# Altium PCB Avalon_ctrlunit.PcbDoc (part 2 of 6)
Units mil, origin at the board's own origin, x right, y up, seen from the top; angles counter-clockwise.
Board outline 3947.62 x 3160.22 mil, 4 copper layers (Top Layer, Mid-Layer 1, Mid-Layer 2, Bottom Layer); 194 components, 260 nets, 936 pads, 465 vias.
Unrouted connection lines stored in the file: 1.
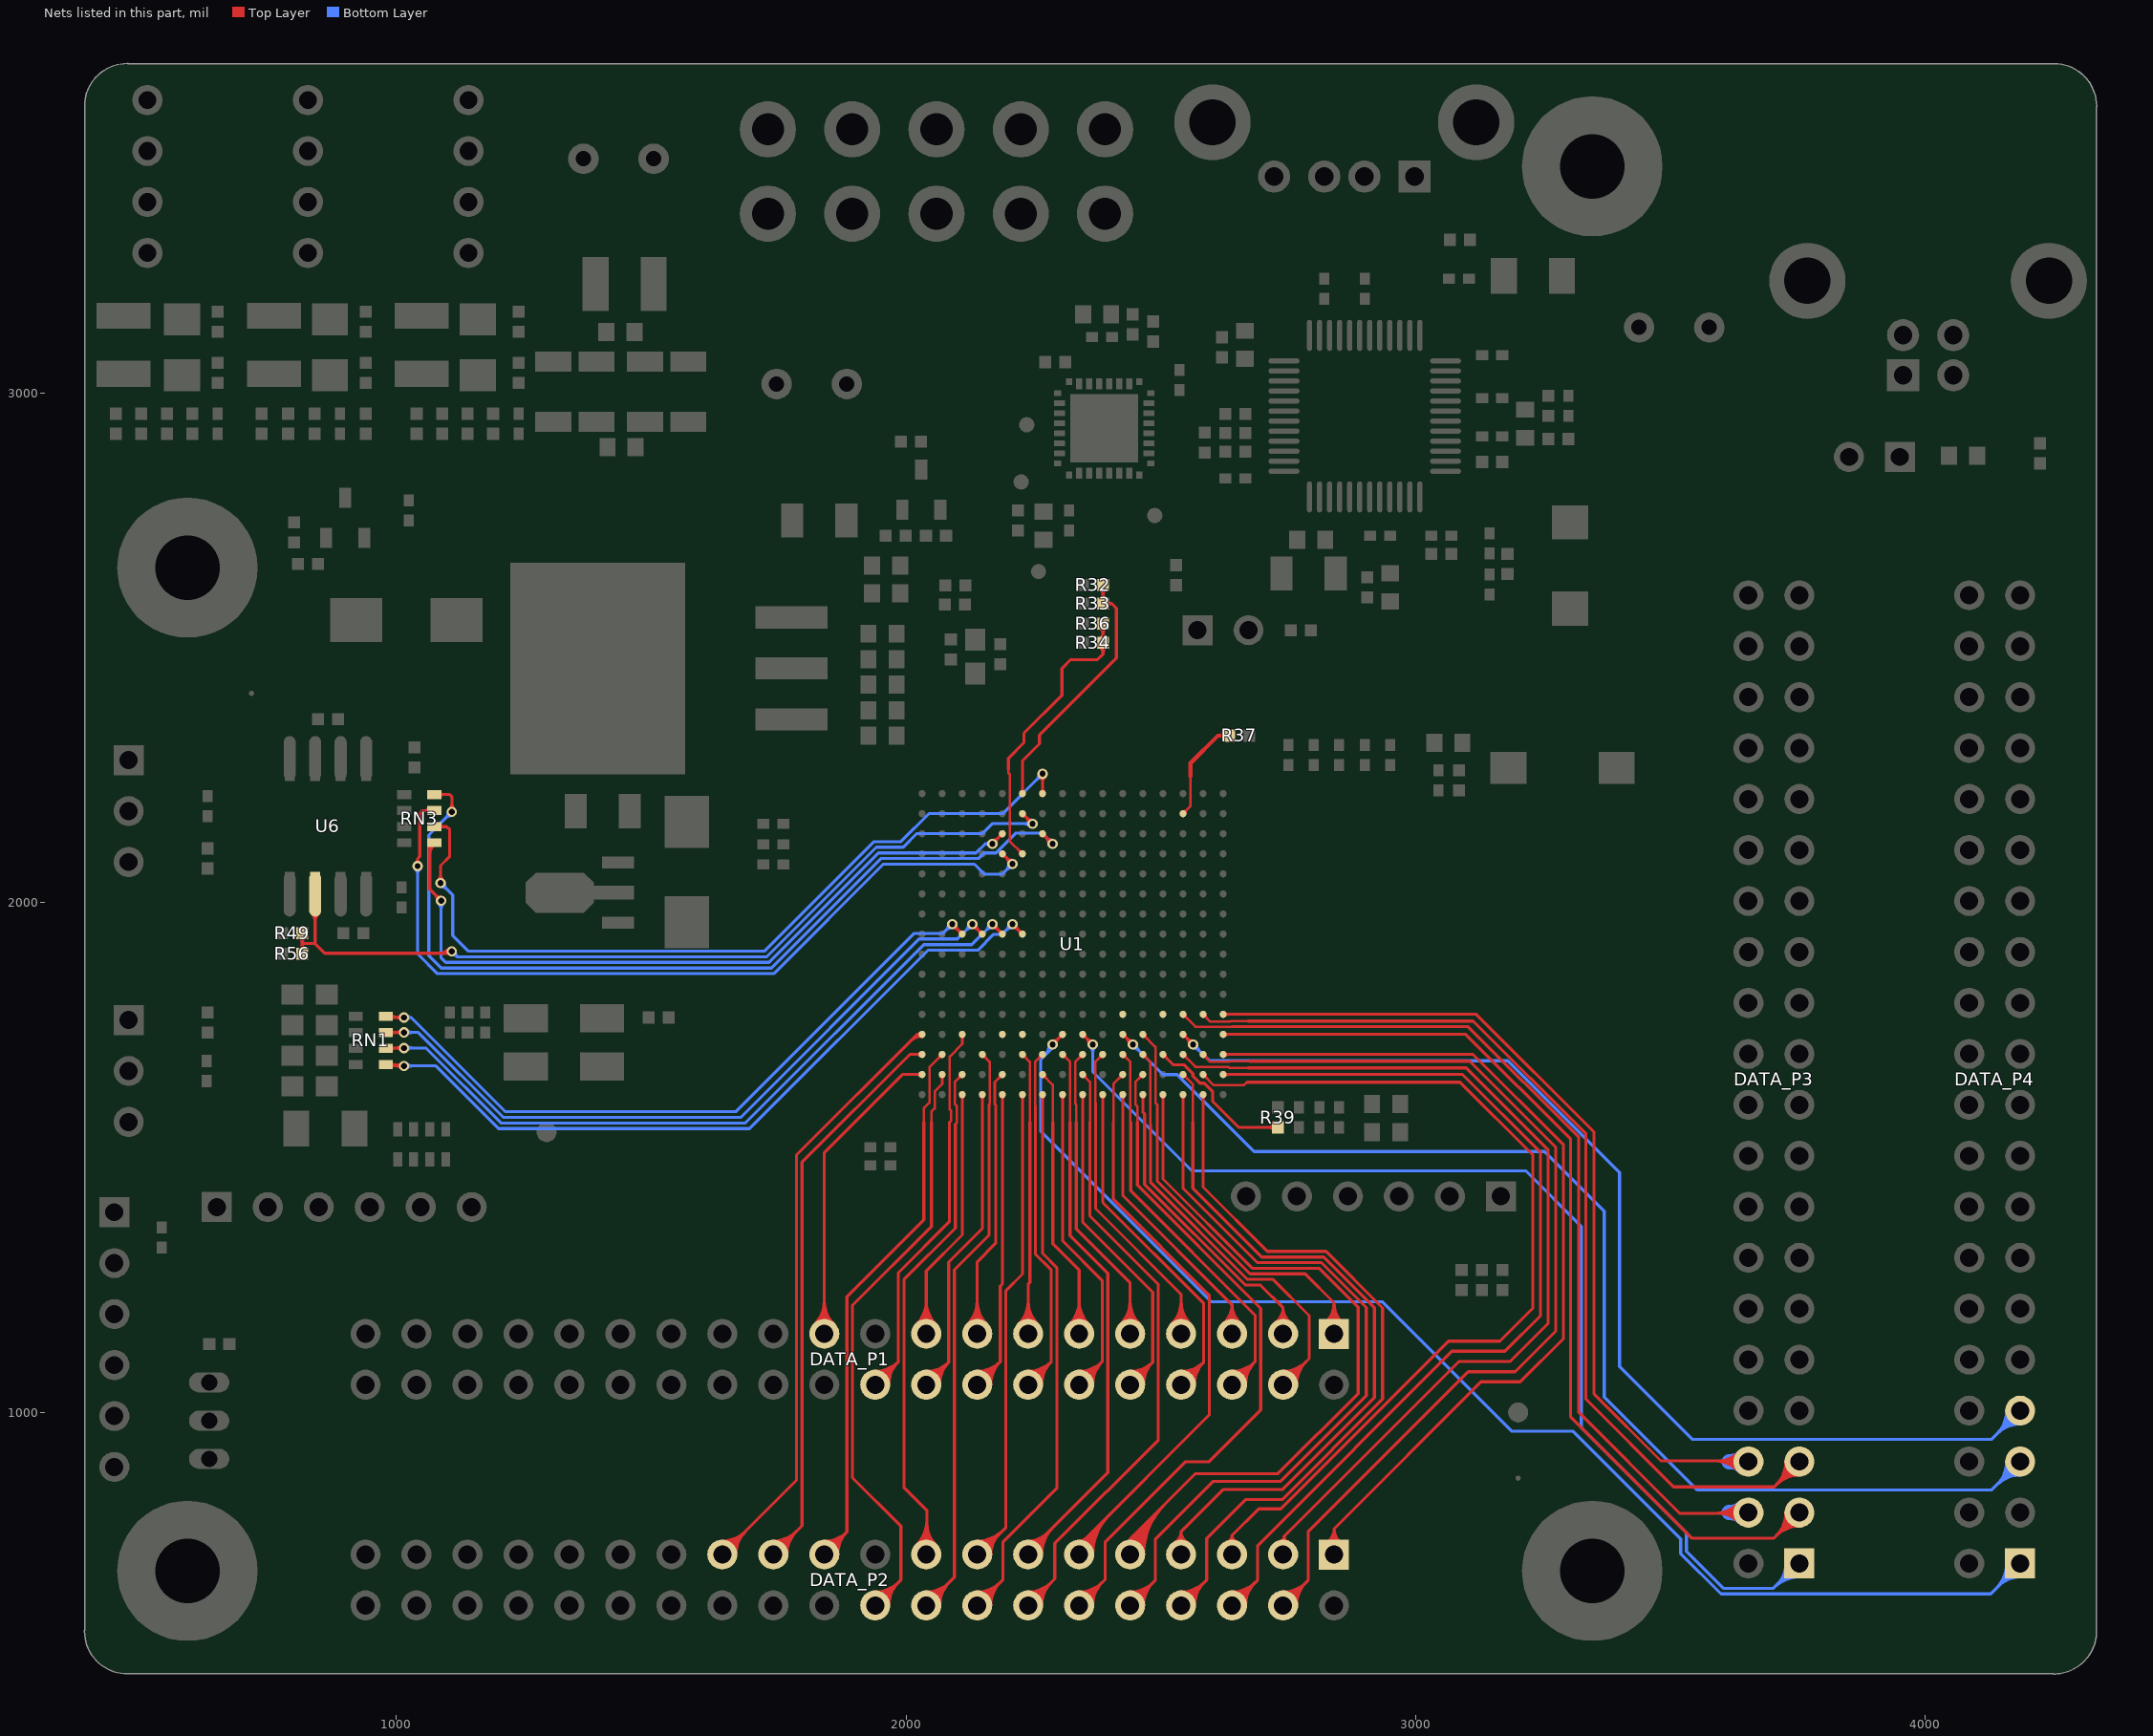
[diagram p4: the nets of this part, all layers, seen from the top]

## Via types
v1: diameter 20, hole 12, Top Layer to Bottom Layer, tented both sides, 334 vias
v2: diameter 32, hole 18, Top Layer to Bottom Layer, tented both sides, 84 vias
v3: diameter 50, hole 28, Top Layer to Bottom Layer, 32 vias
v4: diameter 25.98, hole 12.99, Top Layer to Bottom Layer, tented both sides, 9 vias
v5: diameter 50, hole 28, Top Layer to Bottom Layer, tented both sides, 6 vias

## Nets (pads, with @x,y where several pads share a name; then routed paths per layer and width w, separated by ;. In a path a pad name is that pad's centre, name@x,y a point inside that pad or via, vN(x,y) a via of type N, cw(c..) or ccw(c..) an arc to the next point about the centre after c; other vN are vias at no path point) (continued)
FPGA1_DQ0: RN3.8 U1.P10 | length 1893.3
  Top Layer w6: RN3.8@1074.78,2212.5 1105.01,2212.5 1109.25,2208.25 v1(1109.25,2178.25) ; RN3.8@1083.84,2208.35 cw(c1093.84,2198.35) 1093.84,2212.5 cw(c1093.84,2226.64) RN3.8@1083.84,2216.64 ; v1@1104.3,2183.2 ccw(c1092.35,2195.15) 1109.25,2195.15 ccw(c1126.15,2195.15) v1@1114.2,2183.2 ; U1.P10@2267.94,2131.54 cw(c2267.94,2121.88) 2274.77,2128.71 cw(c2281.6,2135.54) U1.P10@2271.94,2135.54 ; U1.P10@2267.94,2135.54 v1(2287.63,2115.85) v1@2289.46,2114.02 ; v1@2280.63,2115.85 ccw(c2263.73,2115.85) 2275.68,2127.8 ccw(c2287.63,2139.75) v1@2287.63,2122.85
  Bottom Layer w6: v1@1102.25,2178.25 cw(c1085.35,2178.25) 1097.3,2166.3 cw(c1109.25,2154.35) v1@1109.25,2171.25 ; v1(1109.25,2178.25) 1064,2133 1064,1896 1088,1872 1735.89,1872 1950.74,2086.85 2142.16,2086.85 2153.16,2097.85 2176.98,2097.85 2216.13,2137 2266.48,2137 v1(2287.63,2115.85) ; v1@2280.63,2115.85 ccw(c2263.73,2115.85) 2275.68,2127.8 ccw(c2287.63,2139.75) v1@2287.63,2122.85
FPGA1_DQ1: RN3.7 U1.N12 | length 1765.4
  Top Layer w6: v1@1037.57,2077.42 ccw(c1029.97,2086.75) 1042,2086.75 ; v1(1042,2072) 1042,2086.75 ; v1@1046.43,2077.42 cw(c1054.03,2086.75) 1042,2086.75 ; RN3.7@1065.72,2176.86 ccw(c1055.72,2166.86) 1055.72,2181 ccw(c1055.72,2195.14) RN3.7@1065.72,2185.14 ; RN3.7@1074.78,2181 1052,2181 1046.25,2175.25 1046.25,2091 1042,2086.75 ; U1.N12@2189.2,2092.17 cw(c2189.2,2082.51) 2196.03,2089.34 cw(c2202.86,2096.17) U1.N12@2193.2,2096.17 ; U1.N12@2189.2,2096.17 v1(2208.89,2076.48) v1@2210.72,2074.65 ; v1@2201.89,2076.48 ccw(c2184.99,2076.48) 2196.94,2088.43 ccw(c2208.89,2100.38) v1@2208.89,2083.48
  Bottom Layer w6: v1@1037.05,2067.05 cw(c1025.1,2055.1) 1042,2055.1 cw(c1058.9,2055.1) v1@1046.95,2067.05 ; v1(1042,2072) 1042,1900 1081,1861 1740.44,1861 1955.29,2075.85 2134.15,2075.85 2154,2056 2188.41,2056 v1(2208.89,2076.48) ; v1@2201.89,2076.48 cw(c2184.99,2076.48) 2196.94,2064.53 cw(c2208.89,2052.58) v1@2208.89,2069.48
FPGA1_DQ2: RN3.5 U1.P12 | length 1598
  Top Layer w6: 1065.75,2093.95 cw(c1093.91,2093.95) RN3.5@1074,2113.87 ; 1065.75,2108.44 cw(c1079.43,2108.44) RN3.5@1069.76,2118.11 ; RN3.5@1074.78,2118.01 1065.75,2108.98 1065.75,2026.25 v1(1088,2004) ; v1@1081,2004 ccw(c1064.1,2004) 1076.05,2015.95 ccw(c1088,2027.9) v1@1088,2011 ; v1@2167.69,2114.02 v1(2169.52,2115.85) U1.P12@2189.2,2135.54 ; v1@2169.52,2122.85 ccw(c2169.52,2139.75) 2181.47,2127.8 ccw(c2193.42,2115.85) v1@2176.52,2115.85 ; U1.P12@2185.2,2135.54 cw(c2175.55,2135.54) 2182.38,2128.71 cw(c2189.2,2121.88) U1.P12@2189.2,2131.54
  Bottom Layer w6: v1@1083.05,1999.05 cw(c1071.1,1987.1) 1088,1987.1 cw(c1104.9,1987.1) v1@1092.95,1999.05 ; v1(1088,2004) 1088,1892 1097,1883 1731.33,1883 1946.18,2097.85 2137.61,2097.85 2155.61,2115.85 ; v1@2163.9,2111.68 ccw(c2155.61,2105.52) 2155.61,2115.85 ; v1@2163.9,2120.02 cw(c2155.61,2126.18) 2155.61,2115.85 ; v1(2169.52,2115.85) 2155.61,2115.85
FPGA1_HSWAP: R39.2 U1.C4 | length 347.8
  Top Layer w6: U1.C4@2504.17,1698.46 cw(c2504.17,1688.81) 2510.99,1695.64 cw(c2517.82,1702.46) U1.C4@2508.17,1702.46 ; U1.C4@2504.17,1702.46 2523.85,1682.78 2524.63,1682 2546,1682 2563,1665 2563,1660 2577,1646 2585,1646 2602,1629 2602,1610 2652.69,1559.31 R39.2@2730,1559.31 ; R39.2@2723.77,1553.08 ccw(c2708.73,1538.04) 2708.73,1559.31 ccw(c2708.73,1580.59) R39.2@2723.77,1565.55
FPGA1_INIT: R37.2 U1.R3 | length 250.6
  Top Layer w5: U1.R3@2543.54,2174.91 2558.04,2189.41 2558.04,2220.32 2558,2220.35 2558,2226.96 2557.91,2227.06 2557.91,2235.75 2558,2235.85 2558,2248.92 ; U1.R3@2543.54,2179.41 ccw(c2543.54,2190.27) 2551.22,2182.59 ccw(c2558.9,2174.91) U1.R3@2548.04,2174.91
  Top Layer w8: 2558,2248.92 2558,2274 2612,2328 R37.2@2634.31,2328 ; R37.2@2628.79,2322.48 ccw(c2615.46,2309.14) 2615.46,2328 ccw(c2615.46,2346.86) R37.2@2628.79,2333.52
FPGA1_LED1: RN1.5 U1.J11 | length 1631.5
  Top Layer w6: RN1.5@982.28,1680 v1(1015,1680) ; RN1.5@988.59,1686.9 ccw(c1005.24,1703.55) v1@1005.24,1680 ; 997.69,1682.02 ccw(c1001.15,1694.93) v1@1010.24,1685.13 ; 1003.91,1680.36 cw(c1001.77,1672.36) v1@1008.94,1676.5 ; v1@1010.05,1675.05 ccw(c998.1,1663.1) 998.1,1680 ccw(c998.1,1696.9) v1@1010.05,1684.95 ; v1@2208.89,1951.37 cw(c2208.89,1934.47) 2220.84,1946.42 cw(c2232.79,1958.37) v1@2215.89,1958.37 ; v1(2208.89,1958.37) U1.J11@2228.57,1938.68 ; U1.J11@2224.57,1938.68 ccw(c2214.92,1938.68) 2221.75,1945.51 ccw(c2228.57,1952.34) U1.J11@2228.57,1942.68
  Bottom Layer w6: v1(1015,1680) 1077.77,1680 1200.77,1557 1693,1557 2043,1907 2141,1907 2172.24,1938.24 2188.76,1938.24 v1(2208.89,1958.37) ; v1@1019.95,1675.05 cw(c1031.9,1663.1) 1031.9,1680 cw(c1031.9,1696.9) v1@1019.95,1684.95 ; v1@2201.89,1958.37 cw(c2184.99,1958.37) 2196.94,1946.42 cw(c2208.89,1934.47) v1@2208.89,1951.37
FPGA1_LED2: RN1.6 U1.J12 | length 1584.3
  Top Layer w6: RN1.6@979.53,1714.25 980.28,1715 v1(1015,1715) ; RN1.6@988.59,1710.11 cw(c1000.4,1698.3) 1000.4,1715 ; RN1.6@988.59,1718.39 ccw(c996.79,1726.59) 996.79,1715 ; v1@1010.05,1710.05 ccw(c998.1,1698.1) 998.1,1715 ccw(c998.1,1731.9) v1@1010.05,1719.95 ; v1@2169.52,1951.37 cw(c2169.52,1934.47) 2181.47,1946.42 cw(c2193.42,1958.37) v1@2176.52,1958.37 ; v1(2169.52,1958.37) U1.J12@2189.2,1938.68 ; U1.J12@2185.2,1938.68 ccw(c2175.55,1938.68) 2182.38,1945.51 ccw(c2189.2,1952.34) U1.J12@2189.2,1942.68
  Bottom Layer w6: v1(1015,1715) 1058.33,1715 1205.33,1568 1685,1568 2035,1918 2129.15,1918 v1(2169.52,1958.37) ; v1@1019.95,1710.05 cw(c1031.9,1698.1) 1031.9,1715 cw(c1031.9,1731.9) v1@1019.95,1719.95 ; v1@2162.52,1958.37 cw(c2145.62,1958.37) 2157.57,1946.42 cw(c2169.52,1934.47) v1@2169.52,1951.37
FPGA1_LED3: RN1.7 U1.J13 | length 1548.2
  Top Layer w6: RN1.7@979.53,1745.75 v1(1015,1745.75) ; RN1.7@988.59,1741.61 cw(c998.59,1731.61) 998.59,1745.75 cw(c998.59,1759.89) RN1.7@988.59,1749.89 ; v1@1010.05,1740.8 ccw(c998.1,1728.85) 998.1,1745.75 ccw(c998.1,1762.65) v1@1010.05,1750.7 ; v1@2130.15,1951.37 cw(c2130.15,1934.47) 2142.1,1946.42 cw(c2154.05,1958.37) v1@2137.15,1958.37 ; v1(2130.15,1958.37) U1.J13@2149.83,1938.68 ; U1.J13@2145.83,1938.68 ccw(c2136.18,1938.68) 2143.01,1945.51 ccw(c2149.83,1952.34) U1.J13@2149.83,1942.68
  Bottom Layer w6: v1(1015,1745.75) 1043.14,1745.75 1209.89,1579 1676,1579 2026,1929 2100.78,1929 v1(2130.15,1958.37) ; v1@1019.95,1740.8 cw(c1031.9,1728.85) 1031.9,1745.75 cw(c1031.9,1762.65) v1@1019.95,1750.7 ; v1@2123.15,1958.37 cw(c2106.25,1958.37) 2118.2,1946.42 cw(c2130.15,1934.47) v1@2130.15,1951.37
FPGA1_LED4: RN1.8 U1.J14 | length 1506.8
  Top Layer w6: RN1.8@979.53,1777.24 981.77,1775 v1(1015,1775) ; RN1.8@988.59,1773.1 cw(c993.17,1768.52) RN1.8@993.17,1775 ; RN1.8@988.59,1781.39 ccw(c1004.01,1796.8) 1004.01,1775 ; v1@1010.05,1770.05 ccw(c998.1,1758.1) 998.1,1775 ccw(c998.1,1791.9) v1@1010.05,1779.95 ; v1@2090.78,1951.37 cw(c2090.78,1934.47) 2102.73,1946.42 cw(c2114.68,1958.37) v1@2097.78,1958.37 ; v1(2090.78,1958.37) U1.J14@2110.46,1938.68 ; U1.J14@2106.46,1938.68 ccw(c2096.81,1938.68) 2103.64,1945.51 ccw(c2110.46,1952.34) U1.J14@2110.46,1942.68
  Bottom Layer w6: v1(1015,1775) 1029.44,1775 ; v1@1020.49,1770.66 cw(c1029.44,1763.6) 1029.44,1775 ; v1@1020.49,1779.34 ccw(c1029.44,1786.4) 1029.44,1775 ; v1@2083.78,1958.37 cw(c2066.88,1958.37) 2078.83,1946.42 cw(c2090.78,1934.47) v1@2090.78,1951.37 ; v1(2090.78,1958.37) 2072.41,1940 2016,1940 1666,1590 1214.44,1590 1029.44,1775
FPGA1_M0: R32.2 R33.2 U1.T11 | length 612.9
  Top Layer w6: U1.T11@2225.75,2217.1 ccw(c2218.92,2223.93) 2228.57,2223.93 ccw(c2238.23,2223.93) U1.T11@2231.4,2217.1 ; U1.T11@2228.57,2214.28 2228.57,2278.57 2262,2312 2262,2329.14 2413,2480.14 2413,2578 2404,2587 ; R33.2@2380.45,2593.23 ccw(c2365.41,2608.27) 2386.69,2608.27 ccw(c2407.96,2608.27) R33.2@2392.92,2593.23 ; R32.2@2380.45,2617.77 cw(c2365.41,2602.73) 2386.69,2602.73 cw(c2407.96,2602.73) R32.2@2392.92,2617.77 ; R32.2@2386.69,2624 R33.2@2386.69,2587 2404,2587 ; R33.2@2393.81,2581.81 cw(c2404,2574.39) 2404,2587 ; R33.2@2393.81,2592.19 ccw(c2404,2599.61) 2404,2587
FPGA1_M1: R34.2 R36.2 U1.N11 | length 688.3
  Top Layer w5: 2201,2262 2201,2255 2203.7,2252.3 2203.7,2121.04 U1.N11@2228.57,2096.17 ; U1.N11@2224.07,2096.17 ccw(c2213.21,2096.17) 2220.89,2103.85 ccw(c2228.57,2111.53) U1.N11@2228.57,2100.67
  Top Layer w6: 2201,2262 2201,2283.7 2231.44,2314.14 2231.44,2332.77 2306,2407.33 2306,2460 2323,2477 2375.67,2477 2386.69,2488.02 R34.2@2386.69,2510 R36.2@2386.69,2548 ; R34.2@2380.45,2503.77 cw(c2365.41,2488.73) 2386.69,2488.73 cw(c2407.96,2488.73) R34.2@2392.92,2503.77 ; R34.2@2380.45,2516.23 ccw(c2365.41,2531.27) 2386.69,2531.27 ccw(c2407.96,2531.27) R34.2@2392.92,2516.23 ; R36.2@2380.45,2541.77 cw(c2365.41,2526.73) 2386.69,2526.73 cw(c2407.96,2526.73) R36.2@2392.92,2541.77
FPGA1_SCK: R49.2 R56.1 U1.R11 U6.6 | length 1943.8
  Top Layer w6: R56.1@809.74,1906.5 ccw(c797.39,1920) 815.69,1920 ; R49.2@809.74,1933.5 cw(c797.39,1920) 815.69,1920 ; R56.1@815.68,1900 815.69,1920 ; R49.2@815.69,1940 815.69,1920 ; R56.1@821.63,1906.5 cw(c833.98,1920) 815.69,1920 ; R49.2@821.63,1933.5 ccw(c833.98,1920) 815.69,1920 ; U6.6@834.77,1978.42 cw(c819.73,1963.37) 841,1963.37 cw(c862.27,1963.37) U6.6@847.23,1978.42 ; U6.6@841,2016.14 841,1920 ; 1082.44,1901 ccw(c1082.44,1931.56) v1@1104.05,1909.95 ; 1096.93,1901 ccw(c1096.93,1917.07) v1@1108.29,1905.71 ; v1(1109,1905) 1105,1901 860,1901 841,1920 ; U1.R11@2228.57,2170.91 cw(c2228.57,2161.25) 2235.4,2168.08 cw(c2242.23,2174.91) U1.R11@2232.57,2174.91 ; U1.R11@2228.57,2174.91 v1(2248.26,2155.22) v1@2250.09,2153.39 ; v1@2241.26,2155.22 ccw(c2224.36,2155.22) 2236.31,2167.17 ccw(c2248.26,2179.12) v1@2248.26,2162.22 ; 815.69,1920 841,1920
  Bottom Layer w6: v1(1109,1905) 1120,1894 ; v1@1109.42,1898.01 cw(c1110.25,1884.25) 1120,1894 ; v1@1115.99,1904.58 ccw(c1129.75,1903.75) 1120,1894 ; v1@2243.31,2150.27 ccw(c2231.36,2138.32) 2231.36,2155.22 ccw(c2231.36,2172.12) v1@2243.31,2160.17 ; v1(2248.26,2155.22) 2169.22,2155.22 2150,2136 2021.56,2136 1994.56,2109 1941.77,2109 1726.77,1894 1120,1894
FPGA1_SDI: RN3.6 U1.T10 | length 1754
  Top Layer w6: RN3.6@1074.78,2149.5 1099,2149.5 1105,2143.5 1105,2091 1087,2073 v1(1087,2039) ; v1@1082.05,2043.95 ccw(c1070.1,2055.9) 1087,2055.9 ccw(c1103.9,2055.9) v1@1091.95,2043.95 ; RN3.6@1083.84,2145.36 cw(c1093.84,2135.36) 1093.84,2149.5 cw(c1093.84,2163.65) RN3.6@1083.84,2153.65 ; v1@2263,2248.15 cw(c2251.05,2236.2) 2267.94,2236.2 cw(c2284.84,2236.2) v1@2272.89,2248.15 ; U1.T10@2265.12,2217.1 ccw(c2258.29,2223.93) 2267.94,2223.93 ccw(c2277.6,2223.93) U1.T10@2270.77,2217.1 ; U1.T10@2267.94,2214.28 v1(2267.94,2253.1)
  Bottom Layer w6: v1@1087,2032 cw(c1087,2015.1) 1098.95,2027.05 cw(c1110.9,2039) v1@1094,2039 ; v1(1087,2039) 1111,2015 1111,1936 1142,1905 1722.22,1905 1937.22,2120 1990,2120 2045,2175 2189.84,2175 v1(2267.94,2253.1) ; v1@2260.94,2253.1 cw(c2244.05,2253.1) 2256,2241.15 cw(c2267.94,2229.2) v1@2267.94,2246.1
FPGA_A2: DATA_P2.8 U1.A2 | length 1670.2
  Top Layer w6: DATA_P2.8@2539.76,621.29 2590,671.53 2590,753 2666,829 2737.89,829 2935,1026.11 2935,1205 2824,1316 2709,1316 2582.91,1442.09 U1.A2@2582.91,1623.72 ; DATA_P2.8@2539.76,635.82 ccw(c2539.76,670.89) 2564.56,646.09 ccw(c2589.36,621.29) DATA_P2.8@2554.29,621.29 ; DATA_P2.8@2539.76,641.82 ccw(c2539.76,691.38) 2574.81,656.33 ccw(c2609.85,621.29) DATA_P2.8@2560.29,621.29 ; DATA_P2.8@2539.76,647.82 ccw(c2539.76,711.86) 2585.05,666.58 ccw(c2630.33,621.29) DATA_P2.8@2566.29,621.29 ; U1.A2@2580.08,1620.9 cw(c2573.25,1614.07) 2582.91,1614.07 cw(c2592.56,1614.07) U1.A2@2585.73,1620.9
FPGA_A3: DATA_P2.10 U1.A3 | length 1743
  Top Layer w6: DATA_P2.10@2439.76,621.29 2489,670.53 2489,751 2603,865 2735,865 2903,1033 2903,1205.89 2814.89,1294 2689,1294 2543.54,1439.46 U1.A3@2543.54,1623.72 ; DATA_P2.10@2439.76,635.82 ccw(c2439.76,670.89) 2464.56,646.09 ccw(c2489.36,621.29) DATA_P2.10@2454.29,621.29 ; DATA_P2.10@2439.76,641.82 ccw(c2439.76,691.38) 2474.81,656.33 ccw(c2509.85,621.29) DATA_P2.10@2460.29,621.29 ; DATA_P2.10@2439.76,647.82 ccw(c2439.76,711.86) 2485.05,666.58 ccw(c2530.33,621.29) DATA_P2.10@2466.29,621.29 ; U1.A3@2540.71,1620.9 cw(c2533.88,1614.07) 2543.54,1614.07 cw(c2553.19,1614.07) U1.A3@2546.36,1620.9
FPGA_A4: DATA_P2.9 U1.A4 | length 1978.8
  Top Layer w6: DATA_P2.9@2430.29,721.29 cw(c2480.99,721.29) 2445.14,757.14 ; DATA_P2.9@2432.53,728.53 DATA_P2.9@2432.53,744.53 ; DATA_P2.9@2436.11,747.57 ccw(c2435.53,751.76) 2439.76,751.76 ; DATA_P2.9@2436.29,721.29 cw(c2501.48,721.29) 2455.38,767.38 ; DATA_P2.9@2439.76,721.29 2439.76,751.76 ; DATA_P2.9@2442.29,721.29 cw(c2521.96,721.29) 2465.63,777.63 ; DATA_P2.9@2443.42,747.57 cw(c2444,751.76) 2439.76,751.76 ; DATA_P2.9@2448.29,721.29 cw(c2542.45,721.29) 2475.87,787.87 ; DATA_P2.9@2454.29,721.29 cw(c2562.93,721.29) 2486.11,798.11 ; DATA_P2.9@2460.29,721.29 cw(c2583.42,721.29) 2496.35,808.35 ; DATA_P2.9@2466.29,721.29 cw(c2603.9,721.29) 2506.6,818.6 ; U1.A4@2501.34,1620.9 cw(c2494.51,1614.07) 2504.17,1614.07 cw(c2513.82,1614.07) U1.A4@2506.99,1620.9 ; U1.A4@2504.17,1623.72 2504.17,1458.17 2679.33,1283 2810.33,1283 2887,1206.33 2887,1037 2730,880 2568,880 2439.76,751.76
FPGA_A5: DATA_P1.3 U1.A5 | length 736.7
  Top Layer w6: U1.A5@2461.97,1620.9 cw(c2455.14,1614.07) 2464.8,1614.07 cw(c2474.45,1614.07) U1.A5@2467.62,1620.9 ; U1.A5@2464.8,1623.72 2464.8,1589 2468,1585.8 2468,1447.66 2665.66,1250 2695,1250 2739.76,1205.24 ; DATA_P1.3@2724.58,1176.11 ccw(c2704.25,1205.23) 2739.76,1205.23 ; DATA_P1.3@2728.01,1171.19 ccw(c2712.28,1193.73) 2739.76,1193.73 ccw(c2767.25,1193.73) DATA_P1.3@2751.51,1171.19 ; DATA_P1.3@2739.76,1154.36 2739.76,1205.24 ; DATA_P1.3@2754.95,1176.11 cw(c2775.28,1205.23) 2739.76,1205.23
FPGA_A6: DATA_P1.5 U1.A6 | length 766.6
  Top Layer w6: U1.A6@2422.6,1620.9 cw(c2415.77,1614.07) 2425.43,1614.07 cw(c2435.08,1614.07) U1.A6@2428.25,1620.9 ; U1.A6@2425.43,1623.72 2425.43,1425.57 2639.76,1211.24 ; DATA_P1.5@2622.72,1174.69 ccw(c2592.06,1211.23) 2639.76,1211.23 ; DATA_P1.5@2626.57,1170.09 ccw(c2602.85,1198.37) 2639.76,1198.37 ccw(c2676.67,1198.37) DATA_P1.5@2652.96,1170.09 ; DATA_P1.5@2630.43,1165.49 ccw(c2613.64,1185.51) 2639.76,1185.51 ccw(c2665.89,1185.51) DATA_P1.5@2649.1,1165.49 ; DATA_P1.5@2639.76,1154.36 2639.76,1211.24 ; DATA_P1.5@2656.81,1174.69 cw(c2687.46,1211.23) 2639.76,1211.23
FPGA_A7: DATA_P1.8 U1.A7 | length 910.1
  Top Layer w6: U1.A7@2383.23,1620.9 cw(c2376.4,1614.07) 2386.06,1614.07 cw(c2395.71,1614.07) U1.A7@2388.88,1620.9 ; U1.A7@2386.06,1623.72 2386.06,1411.94 2584,1214 2584,1098.6 ; DATA_P1.8@2539.76,1054.36 2584,1098.6 ; DATA_P1.8@2540.01,1068.89 ccw(c2540.56,1102.01) 2563.99,1078.59 ccw(c2587.41,1055.16) DATA_P1.8@2554.29,1054.61 ; DATA_P1.8@2540.11,1074.89 ccw(c2540.89,1121.69) 2573.99,1088.59 ccw(c2607.09,1055.49) DATA_P1.8@2560.29,1054.71 ; DATA_P1.8@2540.21,1080.89 ccw(c2541.22,1141.37) 2584,1098.6 ; DATA_P1.8@2566.29,1054.81 cw(c2626.77,1055.82) 2584,1098.6
FPGA_A8: DATA_P1.10 U1.A8 | length 885
  Top Layer w6: U1.A8@2343.86,1620.9 cw(c2337.03,1614.07) 2346.68,1614.07 cw(c2356.34,1614.07) U1.A8@2349.51,1620.9 ; U1.A8@2346.68,1623.72 2346.68,1373.32 2484,1236 2484,1098.6 ; DATA_P1.10@2439.76,1054.36 2484,1098.6 ; DATA_P1.10@2440.01,1068.89 ccw(c2440.56,1102.01) 2463.99,1078.59 ccw(c2487.41,1055.16) DATA_P1.10@2454.29,1054.61 ; DATA_P1.10@2440.11,1074.89 ccw(c2440.89,1121.69) 2473.99,1088.59 ccw(c2507.09,1055.49) DATA_P1.10@2460.29,1054.71 ; DATA_P1.10@2440.21,1080.89 ccw(c2441.22,1141.37) 2484,1098.6 ; DATA_P1.10@2466.29,1054.81 cw(c2526.77,1055.82) 2484,1098.6
FPGA_A9: DATA_P1.12 U1.A9 | length 868.6
  Top Layer w6: U1.A9@2304.49,1620.9 cw(c2297.66,1614.07) 2307.32,1614.07 cw(c2316.97,1614.07) U1.A9@2310.14,1620.9 ; U1.A9@2307.32,1623.72 2307.32,1336.68 2385,1259 2385,1099.6 ; DATA_P1.12@2339.76,1054.36 2385,1099.6 ; DATA_P1.12@2339.78,1068.89 ccw(c2339.8,1103.87) 2364.54,1079.13 ccw(c2389.27,1054.4) DATA_P1.12@2354.29,1054.37 ; DATA_P1.12@2339.78,1074.89 ccw(c2339.82,1124.31) 2374.77,1089.37 ccw(c2409.71,1054.42) DATA_P1.12@2360.29,1054.38 ; DATA_P1.12@2339.79,1080.89 ccw(c2339.84,1144.76) 2385,1099.6 ; DATA_P1.12@2366.29,1054.38 cw(c2430.16,1054.43) 2385,1099.6
FPGA_A10: DATA_P2.16 U1.A10 | length 1327.5
  Top Layer w6: DATA_P2.16@2139.76,621.29 2190,671.53 2190,745 2296,851 2296,1284 2267.94,1312.06 U1.A10@2267.94,1623.72 ; DATA_P2.16@2139.76,635.82 ccw(c2139.76,670.89) 2164.56,646.09 ccw(c2189.36,621.29) DATA_P2.16@2154.29,621.29 ; DATA_P2.16@2139.76,641.82 ccw(c2139.76,691.38) 2174.81,656.33 ccw(c2209.85,621.29) DATA_P2.16@2160.29,621.29 ; DATA_P2.16@2139.76,647.82 ccw(c2139.76,711.86) 2185.05,666.58 ccw(c2230.33,621.29) DATA_P2.16@2166.29,621.29 ; U1.A10@2265.12,1620.9 cw(c2258.29,1614.07) 2267.94,1614.07 cw(c2277.6,1614.07) U1.A10@2270.77,1620.9
FPGA_A11: DATA_P2.15 U1.A11 | length 1168.1
  Top Layer w6: DATA_P2.15@2139.76,735.82 ccw(c2139.76,779.41) 2170.59,748.59 ; DATA_P2.15@2139.76,741.82 ccw(c2139.76,799.89) 2180.83,758.83 ; DATA_P2.15@2139.76,747.82 ccw(c2139.76,820.38) 2191.07,769.07 ; DATA_P2.15@2141.53,719.53 2196,774 2196,1239 2228.57,1271.57 U1.A11@2228.57,1623.72 ; DATA_P2.15@2160.29,721.29 cw(c2201.33,721.29) 2172.31,750.31 ; DATA_P2.15@2166.29,721.29 cw(c2221.82,721.29) 2182.55,760.55 ; U1.A11@2225.75,1620.9 cw(c2218.92,1614.07) 2228.57,1614.07 cw(c2238.23,1614.07) U1.A11@2231.4,1620.9
FPGA_A12: DATA_P1.16 U1.A12 | length 838.1
  Top Layer w6: DATA_P1.16@2139.76,1054.36 2185,1099.6 ; DATA_P1.16@2139.78,1068.89 ccw(c2139.8,1103.87) 2164.54,1079.13 ccw(c2189.27,1054.4) DATA_P1.16@2154.29,1054.37 ; DATA_P1.16@2139.78,1074.89 ccw(c2139.82,1124.31) 2174.77,1089.37 ccw(c2209.71,1054.42) DATA_P1.16@2160.29,1054.38 ; DATA_P1.16@2139.79,1080.89 ccw(c2139.84,1144.76) 2185,1099.6 ; DATA_P1.16@2166.29,1054.38 cw(c2230.16,1054.43) 2185,1099.6 ; U1.A12@2186.38,1620.9 cw(c2179.55,1614.07) 2189.2,1614.07 cw(c2198.86,1614.07) U1.A12@2192.03,1620.9 ; U1.A12@2189.2,1623.72 2189.2,1251.97 2185,1247.76 2185,1099.6
FPGA_A13: DATA_P1.18 U1.A13 | length 855.4
  Top Layer w6: DATA_P1.18@2039.76,1054.36 2084,1098.6 ; DATA_P1.18@2040.01,1068.89 ccw(c2040.56,1102.01) 2063.99,1078.59 ccw(c2087.41,1055.16) DATA_P1.18@2054.29,1054.61 ; DATA_P1.18@2040.11,1074.89 ccw(c2040.89,1121.69) 2073.99,1088.59 ccw(c2107.09,1055.49) DATA_P1.18@2060.29,1054.71 ; DATA_P1.18@2040.21,1080.89 ccw(c2041.22,1141.37) 2084,1098.6 ; DATA_P1.18@2066.29,1054.81 cw(c2126.77,1055.82) 2084,1098.6 ; U1.A13@2147.01,1620.9 cw(c2140.18,1614.07) 2149.83,1614.07 cw(c2159.49,1614.07) U1.A13@2152.66,1620.9 ; U1.A13@2149.83,1623.72 2149.83,1360.83 2084,1295 2084,1098.6
FPGA_A14: DATA_P1.17 U1.A14 | length 747.4
  Top Layer w6: DATA_P1.17@2021.01,1173.12 ccw(c1975.72,1218.41) 2039.76,1218.41 ccw(c2103.81,1218.41) DATA_P1.17@2058.52,1173.12 ; DATA_P1.17@2025.25,1168.88 ccw(c1990.21,1203.92) 2039.76,1203.92 ccw(c2089.32,1203.92) DATA_P1.17@2054.28,1168.88 ; DATA_P1.17@2029.49,1164.63 ccw(c2004.69,1189.43) 2039.76,1189.43 ccw(c2074.84,1189.43) DATA_P1.17@2050.04,1164.63 ; DATA_P1.17@2039.76,1154.36 2039.76,1277.76 2110.46,1348.46 U1.A14@2110.46,1623.72 ; U1.A14@2107.64,1620.9 cw(c2100.81,1614.07) 2110.46,1614.07 cw(c2120.12,1614.07) U1.A14@2113.29,1620.9
FPGA_B1: DATA_P2.6 U1.B1 | length 2135.2
  Top Layer w6: U1.B1@2622.28,1663.09 3091.91,1663.09 3245,1510 3245,1190 3175,1120 3071,1120 2690,739 2690,671.53 DATA_P2.6@2639.76,621.29 ; U1.B1@2625.1,1660.27 cw(c2631.93,1653.44) 2631.93,1663.09 cw(c2631.93,1672.75) U1.B1@2625.1,1665.92 ; DATA_P2.6@2639.76,635.82 ccw(c2639.76,670.89) 2664.56,646.09 ccw(c2689.36,621.29) DATA_P2.6@2654.29,621.29 ; DATA_P2.6@2639.76,641.82 ccw(c2639.76,691.38) 2674.81,656.33 ccw(c2709.85,621.29) DATA_P2.6@2660.29,621.29 ; DATA_P2.6@2639.76,647.82 ccw(c2639.76,711.86) 2685.05,666.58 ccw(c2730.33,621.29) DATA_P2.6@2666.29,621.29
FPGA_B2: DATA_P2.5 U1.B2 | length 1879.7
  Top Layer w5: U1.B2@2582.91,1658.59 cw(c2582.91,1647.73) 2590.59,1655.41 cw(c2598.27,1663.09) U1.B2@2587.41,1663.09 ; U1.B2@2582.91,1663.09 2604,1642 2663,1642 2669,1648
  Top Layer w6: DATA_P2.5@2630.95,746.31 ccw(c2626.56,758.76) 2639.76,758.76 ; DATA_P2.5@2639.76,721.29 2639.76,758.76 ; DATA_P2.5@2648.58,746.31 cw(c2652.96,758.76) 2639.76,758.76 ; 2669,1648 3087,1648 3230,1505 3230,1205 3165,1140 3064.44,1140 2735.44,811 2692,811 2639.76,758.76
FPGA_B3: DATA_P2.7 U1.B3 | length 1502.2
  Top Layer w5: U1.B3@2543.54,1658.59 cw(c2543.54,1647.73) 2551.22,1655.41 cw(c2558.9,1663.09) U1.B3@2548.04,1663.09 ; U1.B3@2543.54,1663.09 2563,1643.63 2563,1569
  Top Layer w6: DATA_P2.7@2527.16,744.63 ccw(c2515.75,765.76) 2539.76,765.76 ; DATA_P2.7@2530.01,739.35 ccw(c2521.18,755.7) 2539.76,755.7 ccw(c2558.34,755.7) DATA_P2.7@2549.52,739.35 ; DATA_P2.7@2539.76,721.29 2539.76,765.76 ; DATA_P2.7@2552.37,744.63 cw(c2563.77,765.76) 2539.76,765.76 ; 2563,1569 2563,1440 2698,1305 2819.44,1305 2919,1205.44 2919,1029 2739,849 2623,849 2539.76,765.76
FPGA_B5: DATA_P2.12 U1.B5 | length 1574.7
  Top Layer w5: 2454,1569 2454,1601 2450.3,1604.7 2450.3,1648.59 U1.B5@2464.8,1663.09 ; U1.B5@2460.3,1663.09 cw(c2449.43,1663.09) 2457.11,1655.41 cw(c2464.8,1647.73) U1.B5@2464.8,1658.59
  Top Layer w6: DATA_P2.12@2339.76,621.29 2391,672.53 2391,746 2548,903 2594,903 2696,1005 2696,1204.11 2454,1446.11 2454,1569 ; DATA_P2.12@2339.76,635.82 ccw(c2339.76,670.89) 2364.56,646.09 ccw(c2389.36,621.29) DATA_P2.12@2354.29,621.29 ; DATA_P2.12@2339.76,641.82 ccw(c2339.76,691.38) 2374.81,656.33 ccw(c2409.85,621.29) DATA_P2.12@2360.29,621.29 ; DATA_P2.12@2339.76,647.82 ccw(c2339.76,711.86) 2385.05,666.58 ccw(c2430.33,621.29) DATA_P2.12@2366.29,621.29
FPGA_B6: DATA_P2.11 U1.B6 | length 1475.3
  Top Layer w5: 2407,1569 2407,1644.67 U1.B6@2425.43,1663.09 ; U1.B6@2420.93,1663.09 cw(c2410.06,1663.09) 2417.74,1655.41 cw(c2425.43,1647.73) U1.B6@2425.43,1658.59
  Top Layer w6: DATA_P2.11@2339.76,747.82 ccw(c2339.76,767.27) 2353.51,753.51 ; DATA_P2.11@2342.29,721.29 cw(c2392.99,721.29) 2357.14,757.14 ; DATA_P2.11@2348.29,721.29 cw(c2413.48,721.29) 2367.38,767.38 ; DATA_P2.11@2350,720 2350,750 2595,995 2595,1230 2407,1418 2407,1569 ; DATA_P2.11@2354.29,721.29 cw(c2433.96,721.29) 2377.63,777.63 ; DATA_P2.11@2360.29,721.29 cw(c2454.45,721.29) 2387.87,787.87 ; DATA_P2.11@2366.29,721.29 cw(c2474.93,721.29) 2398.11,798.11
FPGA_B8: DATA_P2.14 U1.B8 | length 1459.7
  Top Layer w5: U1.B8@2346.68,1658.59 cw(c2346.68,1647.73) 2354.37,1655.41 cw(c2362.05,1663.09) U1.B8@2351.18,1663.09 ; U1.B8@2346.68,1663.09 2361.18,1648.59 2361.18,1607.18 2361,1607 2361,1569
  Top Layer w6: DATA_P2.14@2239.76,621.29 2292,673.53 2292,743 2495,946 2495,1251 2361,1385 2361,1569 ; DATA_P2.14@2239.76,635.82 ccw(c2239.76,670.89) 2264.56,646.09 ccw(c2289.36,621.29) DATA_P2.14@2254.29,621.29 ; DATA_P2.14@2239.76,641.82 ccw(c2239.76,691.38) 2274.81,656.33 ccw(c2309.85,621.29) DATA_P2.14@2260.29,621.29 ; DATA_P2.14@2239.76,647.82 ccw(c2239.76,711.86) 2285.05,666.58 ccw(c2330.33,621.29) DATA_P2.14@2266.29,621.29
FPGA_B10: DATA_P1.11 U1.B10 | length 789.1
  Top Layer w5: U1.B10@2267.94,1658.59 cw(c2267.94,1647.73) 2275.63,1655.41 cw(c2283.31,1663.09) U1.B10@2272.44,1663.09 ; U1.B10@2267.94,1663.09 2288,1643.04 2288,1569
  Top Layer w6: 2288,1569 2288,1331 2339.76,1279.24 DATA_P1.11@2339.76,1154.36 ; DATA_P1.11@2321.01,1173.12 ccw(c2275.72,1218.41) 2339.76,1218.41 ccw(c2403.81,1218.41) DATA_P1.11@2358.52,1173.12 ; DATA_P1.11@2325.25,1168.88 ccw(c2290.21,1203.92) 2339.76,1203.92 ccw(c2389.32,1203.92) DATA_P1.11@2354.28,1168.88 ; DATA_P1.11@2329.49,1164.63 ccw(c2304.69,1189.43) 2339.76,1189.43 ccw(c2374.84,1189.43) DATA_P1.11@2350.04,1164.63
FPGA_B12: DATA_P1.15 U1.B12 | length 781.2
  Top Layer w5: 2176,1568 2176,1603 2174.33,1604.67 2174.33,1648.22 U1.B12@2189.2,1663.09 ; U1.B12@2184.7,1663.09 cw(c2173.84,1663.09) 2181.52,1655.41 cw(c2189.2,1647.73) U1.B12@2189.2,1658.59
  Top Layer w6: DATA_P1.15@2121.01,1173.12 ccw(c2075.72,1218.41) 2139.76,1218.41 ccw(c2203.81,1218.41) DATA_P1.15@2158.52,1173.12 ; DATA_P1.15@2125.25,1168.88 ccw(c2090.21,1203.92) 2139.76,1203.92 ccw(c2189.32,1203.92) DATA_P1.15@2154.28,1168.88 ; DATA_P1.15@2129.49,1164.63 ccw(c2104.69,1189.43) 2139.76,1189.43 ccw(c2174.84,1189.43) DATA_P1.15@2150.04,1164.63 ; DATA_P1.15@2139.76,1154.36 2139.76,1295.76 2176,1332 2176,1568
FPGA_B14: DATA_P2.17 U1.B14 | length 1261.8
  Top Layer w5: 2097,1566.04 2099.96,1569 2099.96,1601.04 2095.96,1605.04 2095.96,1648.59 U1.B14@2110.46,1663.09 ; U1.B14@2105.96,1663.09 cw(c2095.1,1663.09) 2102.78,1655.41 cw(c2110.46,1647.73) U1.B14@2110.46,1658.59
  Top Layer w6: DATA_P2.17@2021.01,740.05 ccw(c1972.74,788.32) 2041,788.32 ; DATA_P2.17@2025.25,735.81 ccw(c1987.22,773.83) 2041,773.83 ; DATA_P2.17@2029.49,731.56 ccw(c2001.71,759.35) 2041,759.35 ; DATA_P2.17@2041,721.29 2041,808 1996,853 1996,1260.56 2097,1361.56 2097,1566.04 ; 2041,753.38 ccw(c2071.85,753.38) DATA_P2.17@2050.04,731.56 ; 2041,767.86 ccw(c2086.34,767.86) DATA_P2.17@2054.28,735.81 ; 2041,782.35 ccw(c2100.82,782.35) DATA_P2.17@2058.52,740.05
FPGA_B15: DATA_P2.20 U1.B15 | length 1425.5
  Top Layer w5: 2050,1569 2050,1590 2056.59,1596.59 2056.59,1629.73 2071.09,1644.23 U1.B15@2071.09,1663.09 ; U1.B15@2067.91,1659.91 cw(c2060.23,1652.23) 2071.09,1652.23 cw(c2081.96,1652.23) U1.B15@2074.28,1659.91
  Top Layer w6: DATA_P2.20@1939.76,621.29 1990,671.53 1990,777 1895,872 1895,1210 2050,1365 2050,1569 ; DATA_P2.20@1939.76,635.82 ccw(c1939.76,670.89) 1964.56,646.09 ccw(c1989.36,621.29) DATA_P2.20@1954.29,621.29 ; DATA_P2.20@1939.76,641.82 ccw(c1939.76,691.38) 1974.81,656.33 ccw(c2009.85,621.29) DATA_P2.20@1960.29,621.29 ; DATA_P2.20@1939.76,647.82 ccw(c1939.76,711.86) 1985.05,666.58 ccw(c2030.33,621.29) DATA_P2.20@1966.29,621.29
FPGA_B16: DATA_P1.21 U1.B16 | length 859.6
  Top Layer w6: DATA_P1.21@1821.01,1173.12 ccw(c1775.72,1218.41) 1839.76,1218.41 ccw(c1903.81,1218.41) DATA_P1.21@1858.52,1173.12 ; DATA_P1.21@1825.25,1168.88 ccw(c1790.21,1203.92) 1839.76,1203.92 ccw(c1889.32,1203.92) DATA_P1.21@1854.28,1168.88 ; DATA_P1.21@1829.49,1164.63 ccw(c1804.69,1189.43) 1839.76,1189.43 ccw(c1874.84,1189.43) DATA_P1.21@1850.04,1164.63 ; DATA_P1.21@1839.76,1154.36 1839.76,1509.76 1993.09,1663.09 U1.B16@2031.72,1663.09 ; U1.B16@2028.9,1660.27 ccw(c2022.07,1653.44) 2022.07,1663.09 ccw(c2022.07,1672.75) U1.B16@2028.9,1665.92
FPGA_C1: DATA_P2.1 U1.C1 | length 1912
  Top Layer w6: U1.C1@2622.28,1702.46 3112.54,1702.46 3290,1525 3290,1145 3205,1060 3128,1060 2840,772 ; U1.C1@2625.1,1699.64 cw(c2631.93,1692.81) 2631.93,1702.46 cw(c2631.93,1712.12) U1.C1@2625.1,1705.29 ; DATA_P2.1@2824.8,743.19 ccw(c2805.11,772) 2840,772 ; DATA_P2.1@2828.18,738.24 ccw(c2812.88,760.63) 2840,760.63 ; DATA_P2.1@2840,721.29 2840,772 ; 2840,760.43 ccw(c2867.36,760.43) DATA_P2.1@2851.59,738.07 ; DATA_P2.1@2855.05,742.97 cw(c2875.52,772) 2840,772
FPGA_C2: DATA_P2.4 U1.C2 | length 2193.4
  Top Layer w5: U1.C2@2582.91,1697.96 cw(c2582.91,1687.1) 2590.59,1694.78 cw(c2598.27,1702.46) U1.C2@2587.41,1702.46 ; U1.C2@2582.91,1702.46 2597.41,1687.96 2633.96,1687.96 2635,1689 2674.5,1689
  Top Layer w6: 2674.5,1689 3106,1689 3275,1520 3275,1160 3195,1080 3103,1080 2789,766 2789,670.53 DATA_P2.4@2739.76,621.29 ; DATA_P2.4@2739.76,635.82 ccw(c2739.76,670.89) 2764.56,646.09 ccw(c2789.36,621.29) DATA_P2.4@2754.29,621.29 ; DATA_P2.4@2739.76,641.82 ccw(c2739.76,691.38) 2774.81,656.33 ccw(c2809.85,621.29) DATA_P2.4@2760.29,621.29 ; DATA_P2.4@2739.76,647.82 ccw(c2739.76,711.86) 2785.05,666.58 ccw(c2830.33,621.29) DATA_P2.4@2766.29,621.29
FPGA_C3: DATA_P2.3 U1.C3 | length 1905.8
  Top Layer w5: U1.C3@2543.54,1697.96 cw(c2543.54,1687.1) 2551.22,1694.78 cw(c2558.9,1702.46) U1.C3@2548.04,1702.46 ; U1.C3@2543.54,1702.46 2568.04,1677.96 2632.42,1677.96 2634.39,1676 2671,1676
  Top Layer w6: 2671,1676 3099,1676 3260,1515 3260,1175 3185,1100 3085,1100 2742,757 ; DATA_P2.3@2734.11,747.21 ccw(c2731.98,757) 2742,757 ; DATA_P2.3@2742,721.29 2742,757 ; DATA_P2.3@2749.51,745.97 cw(c2753.86,757) 2742,757
FPGA_C5: DATA_P1.4 U1.C5 | length 1084.2
  Top Layer w5: U1.C5@2464.8,1697.96 cw(c2464.8,1687.1) 2472.48,1694.78 cw(c2480.16,1702.46) U1.C5@2469.3,1702.46 ; U1.C5@2464.8,1702.46 2479.67,1687.59 2479.67,1566.33 2480,1566
  Top Layer w6: 2480,1566 2480,1451.22 2670.22,1261 2720,1261 2791,1190 2791,1105.6 DATA_P1.4@2739.76,1054.36 ; DATA_P1.4@2739.76,1068.89 ccw(c2739.76,1103.96) 2764.56,1079.16 ccw(c2789.36,1054.36) DATA_P1.4@2754.29,1054.36 ; DATA_P1.4@2739.76,1074.89 ccw(c2739.76,1124.45) 2774.81,1089.4 ccw(c2809.85,1054.36) DATA_P1.4@2760.29,1054.36 ; DATA_P1.4@2739.76,1080.89 ccw(c2739.76,1144.93) 2785.05,1099.65 ccw(c2830.33,1054.36) DATA_P1.4@2766.29,1054.36
FPGA_C6: DATA_P1.6 U1.C6 | length 1024.6
  Top Layer w5: U1.C6@2425.43,1697.96 cw(c2425.43,1687.1) 2433.11,1694.78 cw(c2440.79,1702.46) U1.C6@2429.93,1702.46 ; U1.C6@2425.43,1702.46 2440.3,1687.59 2440.3,1569.7 2441,1569
  Top Layer w6: 2441,1569 2441,1435 2685,1191 2685,1099.6 ; DATA_P1.6@2639.76,1054.36 2685,1099.6 ; DATA_P1.6@2639.78,1068.89 ccw(c2639.8,1103.87) 2664.54,1079.13 ccw(c2689.27,1054.4) DATA_P1.6@2654.29,1054.37 ; DATA_P1.6@2639.78,1074.89 ccw(c2639.82,1124.31) 2674.77,1089.37 ccw(c2709.71,1054.42) DATA_P1.6@2660.29,1054.38 ; DATA_P1.6@2639.79,1080.89 ccw(c2639.84,1144.76) 2685,1099.6 ; DATA_P1.6@2666.29,1054.38 cw(c2730.16,1054.43) 2685,1099.6
FPGA_C7: DATA_P1.7 U1.C7 | length 874.4
  Top Layer w5: 2372,1569 2372,1607 2371.56,1607.44 2371.56,1687.96 U1.C7@2386.06,1702.46 ; U1.C7@2381.56,1702.46 cw(c2370.69,1702.46) 2378.37,1694.78 cw(c2386.06,1687.1) U1.C7@2386.06,1697.96
  Top Layer w6: 2372,1569 2372,1400 2539.76,1232.24 DATA_P1.7@2539.76,1154.36 ; DATA_P1.7@2521.01,1173.12 ccw(c2475.72,1218.41) 2539.76,1218.41 ccw(c2603.81,1218.41) DATA_P1.7@2558.52,1173.12 ; DATA_P1.7@2525.25,1168.88 ccw(c2490.21,1203.92) 2539.76,1203.92 ccw(c2589.32,1203.92) DATA_P1.7@2554.28,1168.88 ; DATA_P1.7@2529.49,1164.63 ccw(c2504.69,1189.43) 2539.76,1189.43 ccw(c2574.84,1189.43) DATA_P1.7@2550.04,1164.63
FPGA_C8: DATA_P1.9 U1.C8 | length 849.3
  Top Layer w5: 2334,1569 2334,1604 2332.18,1605.82 2332.18,1687.96 U1.C8@2346.68,1702.46 ; U1.C8@2342.18,1702.46 cw(c2331.32,1702.46) 2339,1694.78 cw(c2346.68,1687.1) U1.C8@2346.68,1697.96
  Top Layer w6: 2334,1569 2334,1360 2439.76,1254.24 DATA_P1.9@2439.76,1154.36 ; DATA_P1.9@2421.01,1173.12 ccw(c2375.72,1218.41) 2439.76,1218.41 ccw(c2503.81,1218.41) DATA_P1.9@2458.52,1173.12 ; DATA_P1.9@2425.25,1168.88 ccw(c2390.21,1203.92) 2439.76,1203.92 ccw(c2489.32,1203.92) DATA_P1.9@2454.28,1168.88 ; DATA_P1.9@2429.49,1164.63 ccw(c2404.69,1189.43) 2439.76,1189.43 ccw(c2474.84,1189.43) DATA_P1.9@2450.04,1164.63
FPGA_C9: DATA_P2.13 U1.C9 | length 1312.8
  Top Layer w5: U1.C9@2307.32,1697.96 cw(c2307.32,1687.1) 2315,1694.78 cw(c2322.68,1702.46) U1.C9@2311.82,1702.46 ; U1.C9@2307.32,1702.46 2322,1687.78 2322,1569
  Top Layer w6: DATA_P2.13@2237.53,723.53 2396,882 2396,1273 2322,1347 2322,1569 ; DATA_P2.13@2239.76,741.82 ccw(c2239.76,780.58) 2267.17,753.17 ; DATA_P2.13@2239.76,747.82 ccw(c2239.76,801.06) 2277.41,763.41 ; DATA_P2.13@2254.29,721.29 cw(c2300.16,721.29) 2267.73,753.73 ; DATA_P2.13@2260.29,721.29 cw(c2320.65,721.29) 2277.97,763.97 ; DATA_P2.13@2266.29,721.29 cw(c2341.13,721.29) 2288.21,774.21
FPGA_C10: DATA_P1.14 U1.C10 | length 936.1
  Top Layer w5: 2254,1569 2254,1602 2253.44,1602.56 2253.44,1687.96 U1.C10@2267.94,1702.46 ; U1.C10@2263.44,1702.46 cw(c2252.58,1702.46) 2260.26,1694.78 cw(c2267.94,1687.1) U1.C10@2267.94,1697.96
  Top Layer w6: DATA_P1.14@2239.76,1054.36 2285,1099.6 ; DATA_P1.14@2239.78,1068.89 ccw(c2239.8,1103.87) 2264.54,1079.13 ccw(c2289.27,1054.4) DATA_P1.14@2254.29,1054.37 ; DATA_P1.14@2239.78,1074.89 ccw(c2239.82,1124.31) 2274.77,1089.37 ccw(c2309.71,1054.42) DATA_P1.14@2260.29,1054.38 ; DATA_P1.14@2239.79,1080.89 ccw(c2239.84,1144.76) 2285,1099.6 ; 2254,1569 2254,1310.44 2285,1279.44 2285,1099.6 ; DATA_P1.14@2266.29,1054.38 cw(c2330.16,1054.43) 2285,1099.6
FPGA_C11: DATA_P1.13 U1.C11 | length 806.1
  Top Layer w5: U1.C11@2228.57,1697.96 cw(c2228.57,1687.1) 2236.26,1694.78 cw(c2243.94,1702.46) U1.C11@2233.07,1702.46 ; U1.C11@2228.57,1702.46 2243.07,1687.96 2243.07,1604.07 2243,1604 2243,1569
  Top Layer w6: DATA_P1.13@2221.01,1173.12 ccw(c2175.72,1218.41) 2239.76,1218.41 ccw(c2303.81,1218.41) DATA_P1.13@2258.52,1173.12 ; DATA_P1.13@2225.25,1168.88 ccw(c2190.21,1203.92) 2239.76,1203.92 ccw(c2289.32,1203.92) DATA_P1.13@2254.28,1168.88 ; DATA_P1.13@2229.49,1164.63 ccw(c2204.69,1189.43) 2239.76,1189.43 ccw(c2274.84,1189.43) DATA_P1.13@2250.04,1164.63 ; DATA_P1.13@2239.76,1154.36 2239.76,1251.76 2243,1255 2243,1569
FPGA_C13: DATA_P2.18 U1.C13 | length 1398.6
  Top Layer w5: U1.C13@2149.83,1697.96 cw(c2149.83,1687.1) 2157.52,1694.78 cw(c2165.2,1702.46) U1.C13@2154.33,1702.46 ; U1.C13@2149.83,1702.46 2164.33,1687.96 2164.33,1605.33 2163,1604 2163,1569
  Top Layer w6: DATA_P2.18@2039.76,621.29 2095,676.53 2095,1280 2163,1348 2163,1569 ; DATA_P2.18@2039.76,635.82 ccw(c2039.76,670.89) 2064.56,646.09 ccw(c2089.36,621.29) DATA_P2.18@2054.29,621.29 ; DATA_P2.18@2039.76,641.82 ccw(c2039.76,691.38) 2074.81,656.33 ccw(c2109.85,621.29) DATA_P2.18@2060.29,621.29 ; DATA_P2.18@2039.76,647.82 ccw(c2039.76,711.86) 2085.05,666.58 ccw(c2130.33,621.29) DATA_P2.18@2066.29,621.29 ; DATA_P2.18@2049.03,612.03 DATA_P2.18@2049.03,621.29
FPGA_C15: DATA_P2.21 U1.C15 | length 1319.4
  Top Layer w5: 2035,1569 2035,1596.68 2046.22,1607.91 2046.22,1677.59 U1.C15@2071.09,1702.46 ; U1.C15@2066.59,1702.46 cw(c2055.73,1702.46) 2063.41,1694.78 cw(c2071.09,1687.1) U1.C15@2071.09,1697.96
  Top Layer w6: DATA_P2.21@1839.76,721.29 1884,765.53 1884,1227 2035,1378 2035,1569 ; DATA_P2.21@1840.01,735.82 ccw(c1840.56,768.94) 1863.99,745.52 ccw(c1887.41,722.09) DATA_P2.21@1854.29,721.53 ; DATA_P2.21@1840.11,741.82 ccw(c1840.89,788.62) 1873.99,755.52 ccw(c1907.09,722.42) DATA_P2.21@1860.29,721.64 ; DATA_P2.21@1840.21,747.82 ccw(c1841.22,808.3) 1884,765.52 ccw(c1926.77,722.75) DATA_P2.21@1866.29,721.74
FPGA_C16: DATA_P2.23 U1.C16 | length 1365
  Top Layer w6: DATA_P2.23@1739.76,721.29 1796,777.53 1796,1491 2007.46,1702.46 U1.C16@2031.72,1702.46 ; DATA_P2.23@1739.76,735.82 ccw(c1739.76,770.89) 1764.56,746.09 ccw(c1789.36,721.29) DATA_P2.23@1754.29,721.29 ; DATA_P2.23@1739.76,741.82 ccw(c1739.76,791.38) 1774.81,756.33 ccw(c1809.85,721.29) DATA_P2.23@1760.29,721.29 ; DATA_P2.23@1739.76,747.82 ccw(c1739.76,811.86) 1785.05,766.58 ccw(c1830.33,721.29) DATA_P2.23@1766.29,721.29 ; U1.C16@2028.9,1699.64 ccw(c2022.07,1692.81) 2022.07,1702.46 ccw(c2022.07,1712.12) U1.C16@2028.9,1705.29
FPGA_D1: DATA_P3.3 U1.D1 | length 2129
  Top Layer w6: U1.D1@2622.28,1741.83 3098.17,1741.83 3304,1536 3304,991 3542,753 3702.24,753 DATA_P3.3@3752.79,803.54 ; U1.D1@2625.1,1739.01 cw(c2631.93,1732.18) 2631.93,1741.83 cw(c2631.93,1751.49) U1.D1@2625.1,1744.66 ; DATA_P3.3@3726.26,803.54 cw(c3662.22,803.54) 3707.5,758.26 cw(c3752.79,712.97) DATA_P3.3@3752.79,777.02 ; DATA_P3.3@3732.26,803.54 cw(c3682.7,803.54) 3717.74,768.5 cw(c3752.79,733.46) DATA_P3.3@3752.79,783.02 ; DATA_P3.3@3738.26,803.54 cw(c3703.19,803.54) 3727.99,778.74 cw(c3752.79,753.94) DATA_P3.3@3752.79,789.02
FPGA_D3: DATA_P4.7 U1.D3 | length 2519.8
  Top Layer w6: U1.D3@2543.54,1737.83 cw(c2543.54,1728.18) 2550.36,1735.01 cw(c2557.19,1741.83) U1.D3@2547.54,1741.83 ; U1.D3@2543.54,1741.83 v1(2563.22,1722.15) ; v1@2556.22,1722.15 ccw(c2539.32,1722.15) 2551.27,1734.1 ccw(c2563.22,1746.05) v1@2563.22,1729.15
  Bottom Layer w6: v1@2563.22,1715.15 cw(c2563.22,1698.25) 2575.17,1710.2 cw(c2587.12,1722.15) v1@2570.22,1722.15 ; v1(2563.22,1722.15) 2595.37,1690 3180.67,1690 3400,1470.67 3400,1090 3543,947 4129.31,947 DATA_P4.7@4185.86,1003.54 ; DATA_P4.7@4159.33,1003.54 cw(c4095.29,1003.54) 4140.57,958.26 cw(c4185.86,912.97) DATA_P4.7@4185.86,977.02 ; DATA_P4.7@4165.33,1003.54 cw(c4115.77,1003.54) 4150.82,968.5 cw(c4185.86,933.46) DATA_P4.7@4185.86,983.02 ; DATA_P4.7@4171.33,1003.54 cw(c4136.26,1003.54) 4161.06,978.74 cw(c4185.86,953.94) DATA_P4.7@4185.86,989.02
FPGA_D5: DATA_P1.1 U1.D5 | length 1039.2
  Top Layer w5: U1.D5@2464.8,1737.33 cw(c2464.8,1726.47) 2472.48,1734.15 cw(c2480.16,1741.83) U1.D5@2469.3,1741.83 ; U1.D5@2464.8,1741.83 2489.67,1716.96 2489.67,1607.33 2493,1604 2493,1565
  Top Layer w6: 2493,1565 2493,1453.77 2674.77,1272 2783,1272 2839.76,1215.24 ; DATA_P1.1@2821.7,1173.79 ccw(c2783.19,1215.23) 2839.76,1215.23 ; DATA_P1.1@2825.79,1169.4 ccw(c2795.99,1201.47) 2839.76,1201.47 ccw(c2883.54,1201.47) DATA_P1.1@2853.74,1169.4 ; DATA_P1.1@2829.87,1165 ccw(c2808.78,1187.7) 2839.76,1187.7 ccw(c2870.75,1187.7) DATA_P1.1@2849.65,1165 ; DATA_P1.1@2839.76,1154.36 2839.76,1215.24 ; DATA_P1.1@2857.82,1173.79 cw(c2896.34,1215.23) 2839.76,1215.23
FPGA_D6: DATA_P4.5 U1.D6 | length 2669.3
  Top Layer w6: U1.D6@2425.43,1737.83 cw(c2425.43,1728.18) 2432.25,1735.01 cw(c2439.08,1741.83) U1.D6@2429.43,1741.83 ; U1.D6@2425.43,1741.83 v1(2445.11,1722.15) ; v1@2438.11,1722.15 ccw(c2421.21,1722.15) 2433.16,1734.1 ccw(c2445.11,1746.05) v1@2445.11,1729.15
  Bottom Layer w6: v1@2445.11,1715.15 cw(c2445.11,1698.25) 2457.06,1710.2 cw(c2469.01,1722.15) v1@2452.11,1722.15 ; v1(2445.11,1722.15) 2504.26,1663 2532,1663 2683,1512 3253,1512 3370,1395 3370,1030 3552,848 4130.31,848 DATA_P4.5@4185.86,903.54 ; DATA_P4.5@4159.33,903.54 cw(c4095.29,903.54) 4140.57,858.26 cw(c4185.86,812.97) DATA_P4.5@4185.86,877.02 ; DATA_P4.5@4165.33,903.54 cw(c4115.77,903.54) 4150.82,868.5 cw(c4185.86,833.46) DATA_P4.5@4185.86,883.02 ; DATA_P4.5@4171.33,903.54 cw(c4136.26,903.54) 4161.06,878.74 cw(c4185.86,853.94) DATA_P4.5@4185.86,889.02
FPGA_D8: DATA_P3.1 U1.D8 | length 2461.6
  Top Layer w6: U1.D8@2346.68,1737.83 cw(c2346.68,1728.18) 2353.51,1735.01 cw(c2360.34,1741.83) U1.D8@2350.68,1741.83 ; U1.D8@2346.68,1741.83 v1(2366.37,1722.15) ; v1@2359.37,1722.15 ccw(c2342.47,1722.15) 2354.42,1734.1 ccw(c2366.37,1746.05) v1@2366.37,1729.15
  Bottom Layer w6: v1@2361.42,1717.2 cw(c2349.47,1705.25) 2366.37,1705.25 cw(c2383.27,1705.25) v1@2371.32,1717.2 ; v1(2366.37,1722.15) 2366.37,1668.63 2561,1474 3216,1474 3325,1365 3325,970 3531,764 3531,727.56 3603.56,655 3702,655 DATA_P3.1@3751.67,704.67 ; 3703.67,656.67 cw(c3752.79,607.55) DATA_P3.1@3752.79,677.02 ; 3709.09,662.09 ccw(c3667.63,703.54) DATA_P3.1@3726.26,703.54 ; 3713.91,666.91 cw(c3752.79,628.04) DATA_P3.1@3752.79,683.02 ; 3719.33,672.33 ccw(c3688.12,703.54) DATA_P3.1@3732.26,703.54 ; DATA_P3.1@3724.16,677.16 cw(c3752.79,648.53) DATA_P3.1@3752.79,689.02 ; DATA_P3.1@3729.57,682.57 ccw(c3708.61,703.54) DATA_P3.1@3738.26,703.54
FPGA_D9: DATA_P4.1 U1.D9 | length 2863
  Top Layer w6: v1(2287.63,1722.15) U1.D9@2307.32,1741.83 ; v1@2287.63,1729.15 ccw(c2287.63,1746.05) 2299.58,1734.1 ccw(c2311.53,1722.15) v1@2294.63,1722.15 ; U1.D9@2303.32,1741.83 cw(c2293.66,1741.83) 2300.49,1735.01 cw(c2307.32,1728.18) U1.D9@2307.32,1737.83
  Bottom Layer w6: 2271.07,1699.07 ccw(c2247.99,1722.15) v1@2280.63,1722.15 ; 2281.31,1709.31 ccw(c2268.48,1722.15) v1@2286.63,1722.15 ; v1(2287.63,1722.15) 2287.63,1715.63 2264,1692 2264,1552 2599,1217 2935,1217 3189,963 3309,963 3520,752 3520,723 3599,644 4128,644 DATA_P4.1@4186.7,702.7 ; 4139.38,655.38 ccw(c4091.22,703.54) DATA_P4.1@4159.33,703.54 ; 4143.45,659.45 cw(c4185.86,617.04) DATA_P4.1@4185.86,677.02 ; 4149.62,665.62 ccw(c4111.7,703.54) DATA_P4.1@4165.33,703.54 ; 4153.69,669.69 cw(c4185.86,637.53) DATA_P4.1@4185.86,683.02 ; DATA_P4.1@4159.87,675.87 ccw(c4132.19,703.54) DATA_P4.1@4171.33,703.54 ; DATA_P4.1@4163.93,679.93 cw(c4185.86,658.01) DATA_P4.1@4185.86,689.02
FPGA_D11: U1.D11
FPGA_D12: U1.D12
FPGA_D14: DATA_P1.20 U1.D14 | length 1016.4
  Top Layer w5: 2085,1569 2088.59,1572.59 2088.59,1592.15 2085.96,1594.78 2085.96,1698.47 2110.46,1722.97 U1.D14@2110.46,1741.83 ; U1.D14@2107.28,1738.65 cw(c2099.6,1730.97) 2110.46,1730.97 cw(c2121.33,1730.97) U1.D14@2113.65,1738.65
  Top Layer w6: DATA_P1.20@1939.76,1054.36 1985,1099.6 ; DATA_P1.20@1939.78,1068.89 ccw(c1939.8,1103.87) 1964.54,1079.13 ccw(c1989.27,1054.4) DATA_P1.20@1954.29,1054.37 ; DATA_P1.20@1939.78,1074.89 ccw(c1939.82,1124.31) 1974.77,1089.37 ccw(c2009.71,1054.42) DATA_P1.20@1960.29,1054.38 ; DATA_P1.20@1939.79,1080.89 ccw(c1939.84,1144.76) 1985,1099.6 ; DATA_P1.20@1945.56,1048.56 DATA_P1.20@1945.56,1054.36 ; DATA_P1.20@1966.29,1054.38 cw(c2030.16,1054.43) 1985,1099.6 ; 2085,1569 2085,1374 1985,1274 1985,1099.6
FPGA_D16: DATA_P2.25 U1.D16 | length 1478.7
  Top Layer w6: DATA_P2.25@1639.76,721.29 1785,866.53 1785,1505 2021.83,1741.83 U1.D16@2031.72,1741.83 ; DATA_P2.25@1639.76,735.82 ccw(c1639.76,770.89) 1664.56,746.09 ccw(c1689.36,721.29) DATA_P2.25@1654.29,721.29 ; DATA_P2.25@1639.76,741.82 ccw(c1639.76,791.38) 1674.81,756.33 ccw(c1709.85,721.29) DATA_P2.25@1660.29,721.29 ; DATA_P2.25@1639.76,747.82 ccw(c1639.76,811.86) 1685.05,766.58 ccw(c1730.33,721.29) DATA_P2.25@1666.29,721.29 ; 2008.01,1728.01 cw(c2031.72,1704.3) U1.D16@2031.72,1737.83 ; 2018.26,1738.26 cw(c2031.72,1724.79) U1.D16@2031.72,1743.83 ; U1.D16@2028.9,1739.01 ccw(c2022.07,1732.18) 2022.07,1741.83 ccw(c2022.07,1751.49) U1.D16@2028.9,1744.66
FPGA_E1: DATA_P3.6 U1.E1 | length 2036.1
  Top Layer w6: U1.E1@2622.28,1781.2 3118.8,1781.2 3350,1550 3350,1036 3481,905 DATA_P3.6@3652.79,905 ; U1.E1@2625.1,1778.38 cw(c2631.93,1771.55) 2631.93,1781.2 cw(c2631.93,1790.86) U1.E1@2625.1,1784.03 ; 3585.23,905 cw(c3585.23,835.98) DATA_P3.6@3634.03,884.79 ; 3592.26,905 ccw(c3592.26,964.07) DATA_P3.6@3634.03,922.3 ; 3599.71,905 cw(c3599.71,850.47) DATA_P3.6@3638.27,889.03 ; 3606.75,905 ccw(c3606.75,949.58) DATA_P3.6@3638.27,918.06 ; 3614.2,905 cw(c3614.2,864.95) DATA_P3.6@3642.51,893.27 ; 3621.23,905 ccw(c3621.23,935.1) DATA_P3.6@3642.51,913.82
  Bottom Layer w30: 3615,903.54 DATA_P3.6@3652.79,903.54 ; DATA_P3.6@3642.51,893.27 ccw(c3617.71,868.47) 3617.71,903.54 ccw(c3617.71,938.62) DATA_P3.6@3642.51,913.82
FPGA_E2: DATA_P3.5 U1.E2 | length 2131.1
  Top Layer w5: U1.E2@2582.91,1776.7 cw(c2582.91,1765.84) 2590.59,1773.52 cw(c2598.27,1781.2) U1.E2@2587.41,1781.2 ; U1.E2@2582.91,1781.2 2597.41,1766.7 2635.7,1766.7 2637,1768 2671,1768
  Top Layer w6: 2671,1768 3112.56,1768 3334,1546.56 3334,1026 3506,854 3703.24,854 DATA_P3.5@3752.79,903.54 ; DATA_P3.5@3726.26,903.54 cw(c3662.22,903.54) 3707.5,858.26 cw(c3752.79,812.97) DATA_P3.5@3752.79,877.02 ; DATA_P3.5@3732.26,903.54 cw(c3682.7,903.54) 3717.74,868.5 cw(c3752.79,833.46) DATA_P3.5@3752.79,883.02 ; DATA_P3.5@3738.26,903.54 cw(c3703.19,903.54) 3727.99,878.74 cw(c3752.79,853.94) DATA_P3.5@3752.79,889.02
FPGA_E3: DATA_P3.4 U1.E3 | length 2174.9
  Top Layer w5: U1.E3@2543.54,1776.7 cw(c2543.54,1765.84) 2551.22,1773.52 cw(c2558.9,1781.2) U1.E3@2548.04,1781.2 ; U1.E3@2543.54,1781.2 2568.04,1756.7 2640.7,1756.7 2641,1757 2669,1757
  Top Layer w6: 2669,1757 3103,1757 3320,1540 3320,1000 3518,802 DATA_P3.4@3652.79,802 ; 3585.02,802 ccw(c3585.02,871.31) DATA_P3.4@3634.03,822.3 ; 3592.47,802 cw(c3592.47,743.23) DATA_P3.4@3634.03,784.79 ; 3599.5,802 ccw(c3599.5,856.83) DATA_P3.4@3638.27,818.06 ; 3606.96,802 cw(c3606.96,757.71) DATA_P3.4@3638.27,789.03 ; 3613.99,802 ccw(c3613.99,842.34) DATA_P3.4@3642.51,813.82 ; 3621.44,802 cw(c3621.44,772.2) DATA_P3.4@3642.51,793.27
  Bottom Layer w30: 3615,803.54 DATA_P3.4@3652.79,803.54 ; DATA_P3.4@3642.51,793.27 ccw(c3617.71,768.47) 3617.71,803.54 ccw(c3617.71,838.62) DATA_P3.4@3642.51,813.82
FPGA_E4: U1.E4
FPGA_E6: U1.E6